# Altium PCB PCB1.PcbDoc
Units mm, origin at the board's own origin, x right, y up, seen from the top; angles counter-clockwise.
Board outline 50.8 x 22.35 mm, 2 copper layers (Top Layer, Bottom Layer); 41 components, 30 nets, 162 pads, 0 vias.
Unrouted connection lines stored in the file: 51.
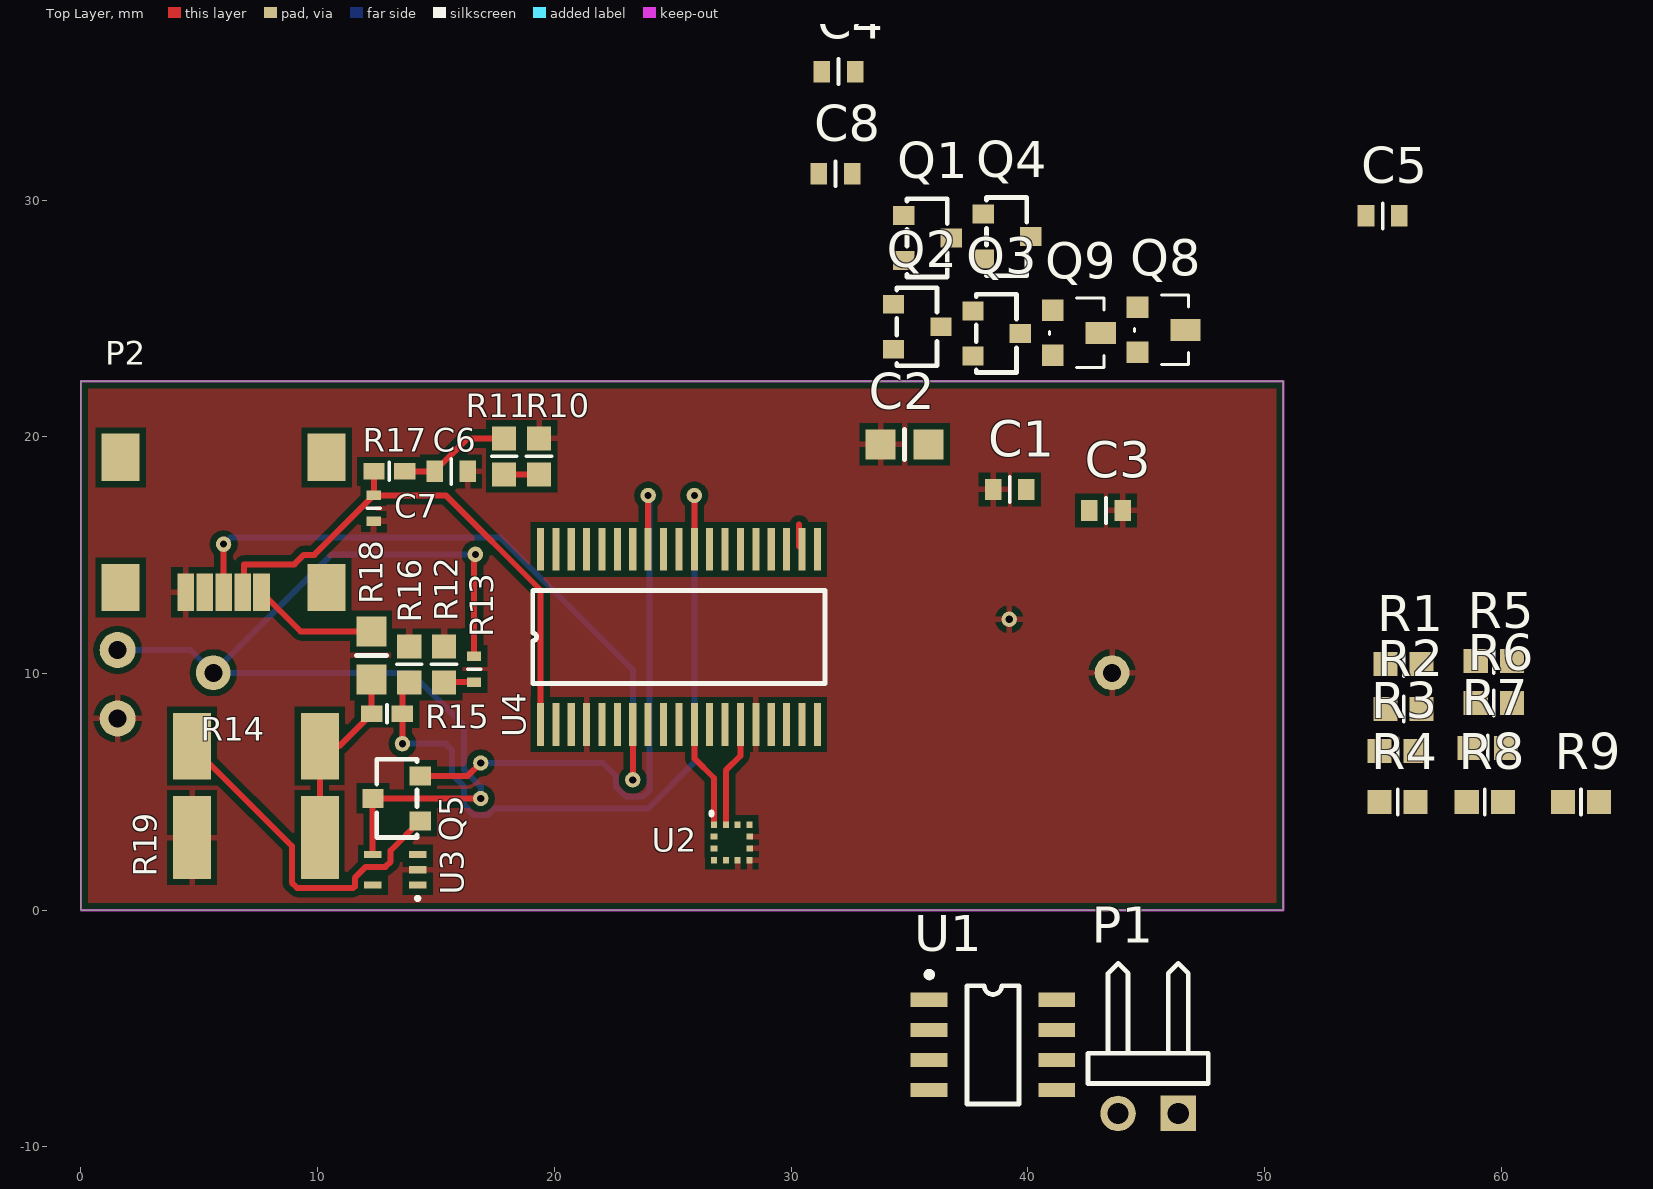
[diagram p0: Top Layer view]
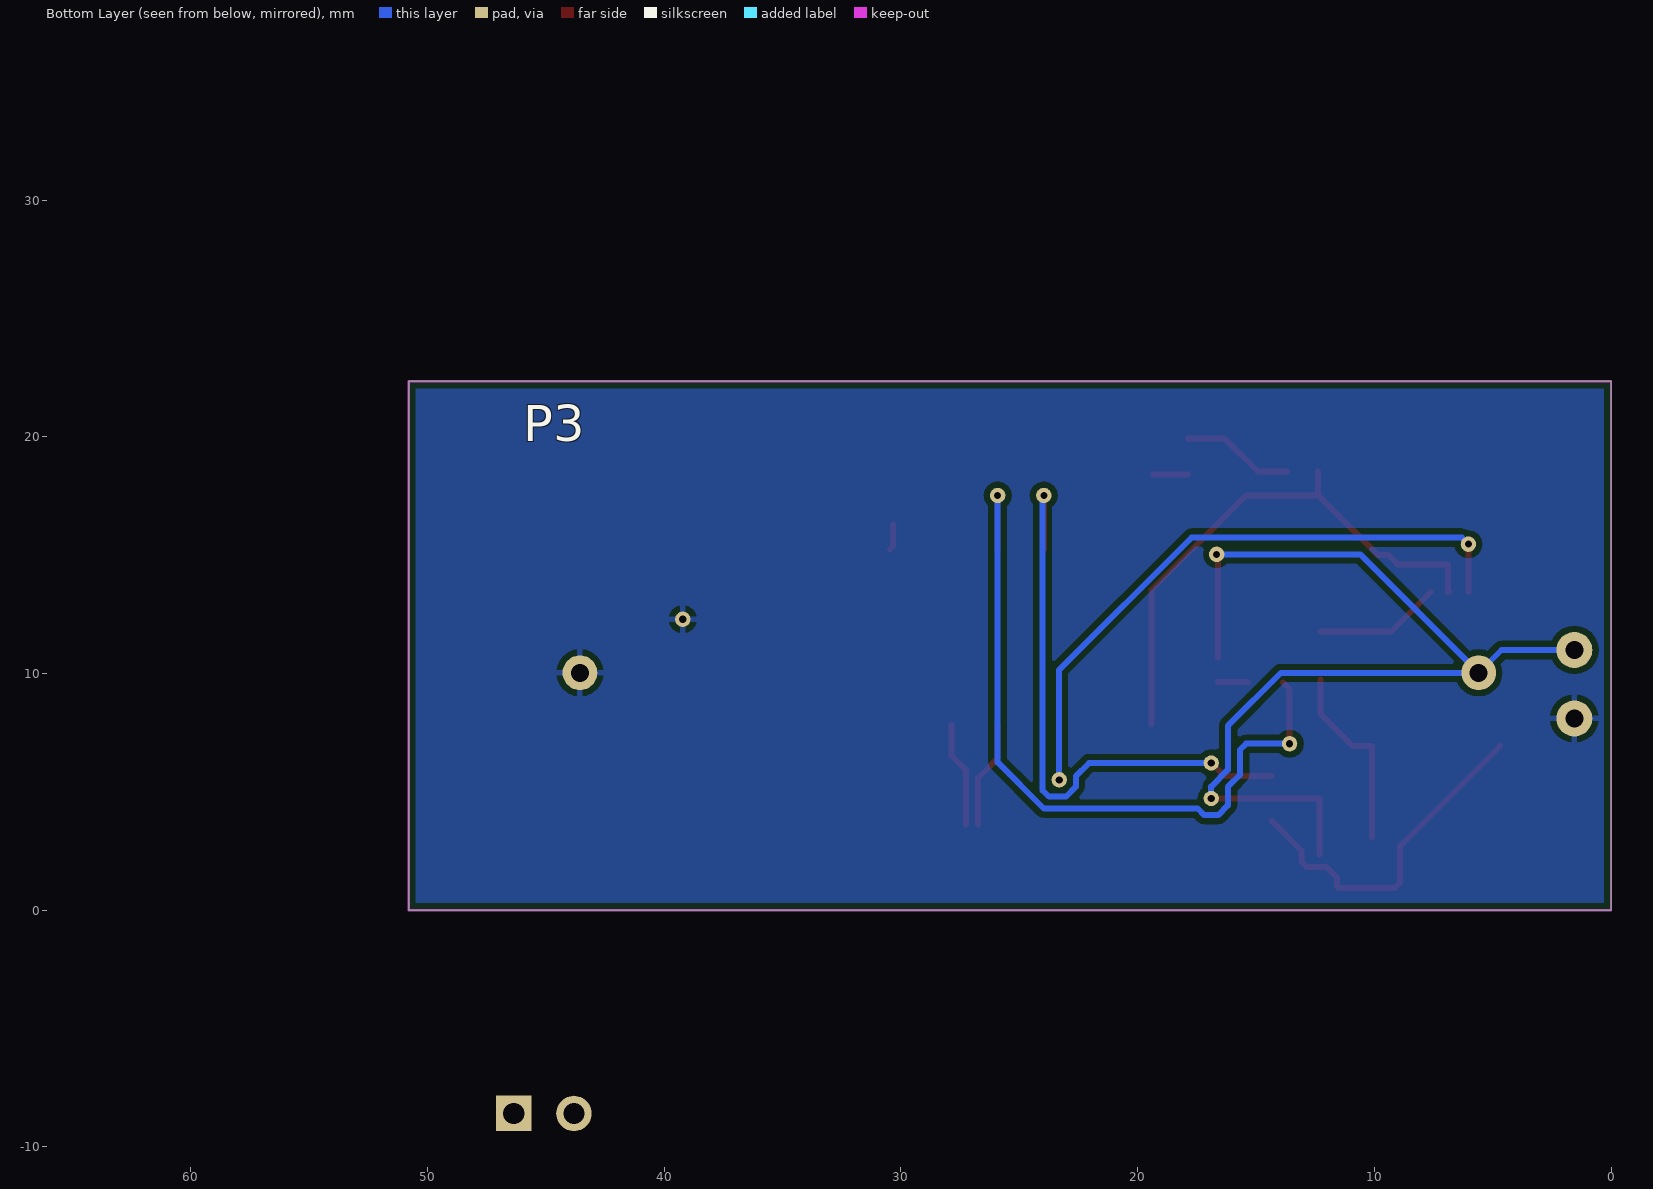
[diagram p1: Bottom Layer view, seen from below]

## Layer stack, top to bottom
Top Solder: solder mask 0.0102, Solder Resist, Dk 3.5
Top Layer: signal copper 0.0356
Dielectric 1: dielectric 0.32, FR-4, Dk 4.8
Bottom Layer: signal copper 0.0356
Bottom Solder: solder mask 0.0102, Solder Resist, Dk 3.5

## Board outline
0,0 50.8,0 50.8,22.352 0,22.352

## Design rules (kind name [scope] priority, off if disabled: settings)
Clearance [All] p1: gap=0.254
PolygonConnect [All] p1: connectstyle=Relief reliefconductorwidth=0.254 reliefentries=4 polygonreliefangle="90 Angle" airgapwidth=0.254
RoutingVias [All] p1: holewidth=0.711 width=1.27 viastyle="Through Hole" minholewidth=0.711 minwidth=1.27 maxholewidth=0.711 maxwidth=1.27
SolderMaskExpansion [All] p1: expansion=0.102
Width [All] p1: maxlimit=0.254 minlimit=0.254 preferedwidth=0.254
30 further rules are at their usual default settings.

## Components (designator, comment, footprint, x,y, rotation, side; value= is the part's Value field where it differs from the comment)
C1 "0.1uF" "0603 Small" 39.243,17.78 r0 top
C2 "10uF" "0805 Small" 34.798,19.685 r0 top
C3 "0.1uF" "0603 Small" 43.307,16.891 r0 top
C4 "0.1uF" "0603 Small" 32.004,35.433 r0 top
C5 "0.1uF" "0603 Small" 54.991,29.337 r0 top
C6 "0.1uF" "0603 Small" 15.638,18.542 r0 top
C7 "1nF" "0402 Small" 12.37,16.979 r90 top
C8 "0.1uF" "0603 Small" 31.877,31.115 r0 top
P1 "Header 2H" HDR1X2H 46.355,-8.585 r180 top
P2 "Mini USB" "Mini USB" 10.376,19.137 r270 top
P3 "Header 2" BH123A 43.561,10.033 r180 bottom
Q1 "MOSFET-P" SOT23 35.763,28.409 r270 top
Q2 "MOSFET-N" SOT23 35.331,24.653 r270 top
Q3 "MOSFET-N" SOT23 38.689,24.374 r270 top
Q4 "MOSFET-P" SOT23 39.121,28.463 r270 top
Q5 "MOSFET-N" SOT23 13.335,4.73 r90 top
Q8 "MMST2222A" SOT-23N 45.651,24.526 r270 top
Q9 "MMST2222A" SOT-23N 42.07,24.399 r270 top
R1 "1K" "0603 resistor" 55.88,10.414 r0 top
R2 "1M" "0603 resistor" 55.88,8.509 r0 top
R3 "10M" "0603 resistor" 55.626,6.731 r0 top
R4 "10M" "0603 resistor" 55.626,4.572 r0 top
R5 "1M" "0603 resistor" 59.69,10.541 r0 top
R6 "1K" "0603 resistor" 59.69,8.763 r0 top
R7 "0.1" "0603 resistor" 59.436,6.858 r0 top
R8 "100KΩ" "0603 Resistor" 59.309,4.572 r0 top
R9 "1MΩ" "0603 Resistor" 63.373,4.572 r0 top
R10 "1MΩ" "0603 Resistor" 19.355,19.177 r270 top
R11 "1MΩ" "0603 Resistor" 17.882,19.177 r90 top
R12 "1MΩ" "0603 Resistor" 15.342,10.389 r270 top
R13 "2.7M" "0402 Small" 16.608,10.185 r270 top
R14 "2.7Ω" "2010 resistor" 7.391,6.934 r0 top
R15 "330K" "0402 Resistor" 12.929,8.306 r0 top
R16 "1MΩ" "0603 resistor" 13.869,10.389 r270 top
R17 "47K" "0402 Resistor" 13.03,18.542 r180 top
R18 "2.4" "0805 Small" 12.268,10.77 r90 top
R19 "13Ω" "2512 RESISTOR" 7.391,3.073 r0 top
U1 "TS27L2" SOIC-8 38.532,-5.69 r0 top
U2 "LIS2HH12" LIS2HH12 26.745,2.116 r90 top
U3 "TPS71533DCKR" SC70_5 14.224,1.062 r180 top
U4 "MSP430F2272IDA" MSP430F2272IDA 19.413,7.849 r90 top

## Footprints (in the part's own frame and the unit in brackets; to place one, negate y for a bottom-side part, rotate by r counter-clockwise, add the part's x,y. Pads: shape width x height; smd on the part's side, far side on the other; paste and mask are expansions set on the pad)
"0402 Resistor" [mm]
  rect 0.9x0.7 smd: 1(-0.65,0) 2(0.65,0)
  silkscreen extent 0,-0.38 0,0.38, body extent -0.52,-0.27 0.53,0.28, height 0.25
"0402 Small" [mm]
  rect 0.4x0.6 smd: 1(-0.55,0) 2(0.55,0)
  silkscreen extent 0,-0.27 0,0.28, body extent -0.52,-0.27 0.53,0.28, height 0.25
"0603 resistor" [mil]
  rect 40x40 smd: 1(-30,0) 2(30,0)
  silkscreen extent 0,-21 0,21, body extent -30,-15 31,15, height 20
"0603 Resistor" [mil]
  rect 40x40 smd: 1(-30,0) 2(30,0)
  silkscreen extent 0,-21 0,21, body extent -30,-15 31,15, height 20
"0603 Small" [mm]
  rect 0.7x0.9 smd: 1(-0.7,0) 2(0.7,0)
  silkscreen extent 0,-0.53 0,0.53, body extent -0.77,-0.38 0.77,0.38, height 0.51
"0805 Small" [mil]
  rect 50x50 smd: 1(-40,0) 2(40,0)
  silkscreen extent 0,-25 0,25, body extent -40,-25 40,25, height 25
"2010 resistor" [mm]
  rect 1.6x2.8 smd: 1(-2.7,0) 2(2.7,0)
"2512 RESISTOR" [mm]
  rect 1.6x3.5 smd: 1(-2.7,0) 2(2.7,0)
BH123A [mm] "CR123A Battery Holder"
  round 1.47 hole 0.762: 2(0,0) 2(37.97,0)
HDR1X2H [mm] "Connector; Header; 2 Position; Right Angle"
  rect 1.5x1.5 hole 0.9: 1(0,0)
  round 1.5 hole 0.9: 2(2.54,0)
  silkscreen extent -1.27,-6.35 3.81,-1.27
LIS2HH12 [mm]
  rect 0.275x0.25 smd: 1(1.5,0) 2(1.5,-0.5) 3(1.5,-1) 4(1.5,-1.5) 7(0,-1.5) 8(0,-1) 9(0,-0.5) 10(0,0)
  rect 0.25x0.275 smd: 5(1,-1.5) 6(0.5,-1.5) 11(0.5,0) 12(1,0)
  silkscreen extent 1.93,0.1 2.01,0.1
"Mini USB" [mm]
  rect 1.6x0.7 smd: 1(5.7,-2.75) 2(5.7,-3.55) 3(5.7,-4.35) 4(5.7,-5.15) 5(5.7,-5.95)
  rect 2x1.6 smd: 6(5.5,-8.7) 7(0,-8.7) 8(0,0) 9(5.5,0)
MSP430F2272IDA [mm]
  rect 1.8x0.3 smd: 1(0,0) 2(0,-0.65) 3(0,-1.3) 4(0,-1.95) 5(0,-2.6) 6(0,-3.25) 7(0,-3.9) 8(0,-4.55) 9(0,-5.2) 10(0,-5.85) 11(0,-6.5) 12(0,-7.15) 13(0,-7.8) 14(0,-8.45) 15(0,-9.1) 16(0,-9.75) 17(0,-10.4) 18(0,-11.05) 19(0,-11.7) 20(7.4,-11.7) 21(7.4,-11.05) 22(7.4,-10.4) 23(7.4,-9.75) 24(7.4,-9.1) 25(7.4,-8.45) 26(7.4,-7.8) 27(7.4,-7.15) 28(7.4,-6.5) 29(7.4,-5.85) 30(7.4,-5.2) 31(7.4,-4.55) 32(7.4,-3.9) 33(7.4,-3.25) 34(7.4,-2.6) 35(7.4,-1.95) 36(7.4,-1.3) 37(7.4,-0.65) 38(7.4,0)
  silkscreen extent 1.73,-12.03 5.67,0.33
SC70_5 [mm]
  rect 0.75x0.3 smd: 1(0,0) 2(0,-0.65) 3(0,-1.3) 4(1.9,-1.3) 5(1.9,0)
  silkscreen extent -0.08,0.48 0.08,0.63, body extent 0.3,-1.66 1.54,0.34, height 1.07
SOIC-8 [mm]
  rect 1.55x0.6 smd: 1(-2.7,1.905) 2(-2.7,0.635) 3(-2.7,-0.635) 4(-2.7,-1.905) 5(2.7,-1.905) 6(2.7,-0.635) 7(2.7,0.635) 8(2.7,1.905)
  silkscreen extent -2.81,-2.5 1.1,3.09, body extent -1.91,-2.54 1.91,2.54, height 1.52
SOT23 [mm]
  rect 0.8x0.9 smd: 1(-0.95,-1) 2(0.95,-1) 3(0,1)
  silkscreen extent -1.65,-0.86 1.65,0.84, body extent -1.45,-1.32 1.45,1.47, height 1.02
SOT-23N [mil]
  rect 36x36 smd: B(-37.5,-40) E(37.5,-40)
  rect 36x50 smd: C(0.5,40)
  silkscreen extent -57,-45 58,45, body extent -57,-52 57,58, height 40

## Part data
C1 C3 C4 C5 C6 C8: library part CAP, "CAP CER 0.1UF 50V 10% X7R 0603"
C2: library part Cap, "CAP CER 10UF 6.3V X5R 0805"
C7: library part Cap, "CAP CER 1000PF 6.3V X5R 0402"
P1: "Header, 2-Pin, Right Angle"
P2: "CONN MINI USB RCPT RA TYPE B SMD"
P3: "CR123A Battery Holder"
Q1 Q4: "MOSFET P-CH 20V 4.2A SOT23"
Q2 Q3 Q5: "MOSFET N-CH 20V 2.3A SOT23"
Q8 Q9: library part NPN1, "TRANSISTOR NPN GP 40V SOT23"
R1 R6: library part Resistor, "RES SMD 1K OHM 5% 1/10W 060"
R2 R5: library part Resistor, "RES SMD 1M OHM 5% 1/10W 0603"
R3 R4: library part Resistor, "RES SMD 10M OHM 5% 1/10W 0603"
R7: library part Resistor, "RES SMD 0.1 OHM 5% 2W 2512"
R8: library part Res1, "RES SMD 100K OHM 5% 1/10W 0603"
R9 R10 R11 R12 R16: library part Res1, "RES SMD 1M OHM 5% 1/10W 0603"
R13: library part Resistor, "RES SMD 2.7M OHM 5% 1/16W 0402"
R14: library part Resistor, "RES SMD 2.7 OHM 5% 3/4W 2010"
R15: library part Resistor, "RES SMD 330K OHM 5% 1/10W 0603"
R17: library part Resistor, "RES SMD 47K OHM 5% 1/16W 0402"
R18: library part Resistor, "RES SMD 2 OHM 5% 0.4W 0805"
R19: library part Resistor, "RES SMD 13 OHM 1% 2W 2512"
U1: "OP AMP - 2 CHANNEL"
U3: "IC REG LDO 3.3V 50MA SC70-5"
U4: library part CMP-0365-00081-2, "IC MCU 16BIT 32KB FLASH 38TSSOP"

## Free pads (board coordinates)
  round 1.524 hole 0.762: 2(1.549,10.998) 3(1.549,8.103)
  round 0.65 hole 0.3: 2(6.026,15.469) 2(13.579,7.036) 2(16.662,15.037) 2(16.891,4.724) 2(16.891,6.223) 2(23.313,5.512) 2(23.963,17.526) 2(25.913,17.526) 2(39.218,12.294)

## Nets (pads, with @x,y where several pads share a name; then routed paths per layer and width w, separated by ;. In a path a pad name is that pad's centre, name@x,y a point inside that pad or via, vN(x,y) a via of type N, cw(c..) or ccw(c..) an arc to the next point about the centre after c; other vN are vias at no path point)
GND: C1.1 C2.1 C3.2 C4.2 C5.2 C6.2 C7.1 C8.1 P2.5 P3.2@43.561,10.033 pad.2@39.218,12.294 pad.3 R7.1 R8.1 R10.1 R12.1 R16.1 R19.1 U1.4 U2.5 U2.6 U2.7 U2.8 U3.2 U4.4 U4.15
NetC4_1: C4.1 U4.16
NetC5_1: C5.1 U4.2
NetC7_2: C7.2 P2.2 R17.2 U4.1 | length 23.3
  Top Layer w0.254: P2.2 6.895,13.437 6.895,14.618 9.018,14.618 9.418,15.018 9.858,15.018 C7.2 ; R17.2 12.37,18.532 C7.2 ; U4.1 19.413,13.531 15.415,17.529 C7.2
NetP1_2: P1.2 R10.2 R11.1 U4.21 | length 2.6
  Top Layer w0.254: R11.1 R10.2 ; 30.344,16.306 30.344,15.368 U4.21
NetP2_1: P2.1 R18.2 | length 5.3
  Top Layer w0.254: P2.1 9.277,11.786 R18.2
NetP2_3: P2.3 pad.2@6.026,15.469 pad.2@23.313,5.512 U4.7 | length 28.7
  Top Layer w0.254: P2.3 pad.2@6.026,15.468 ; pad.2@23.313,5.512 U4.7
  Bottom Layer w0.254: pad.2@6.026,15.469 6.3,15.743 17.724,15.743 23.313,10.154 pad.2@23.313,5.512
NetQ1_2: Q1.2 Q2.2 Q9.C R2.2 R3.2
NetQ1_3: Q1.3 Q2.1
NetQ2_3: Q2.3 Q3.3 Q8.E Q9.E R3.1 R4.1 R7.2 U1.3 U4.22
NetQ3_1: Q3.1 Q4.3
NetQ3_2: Q3.2 Q4.2 Q8.C R4.2 R5.2
NetQ5_1: Q5.1 R14.1 | length 14.7
  Top Layer w0.254: R14.1 8.91,2.715 8.91,1.166 9.134,0.942 11.497,0.942 11.568,1.013 11.568,1.37 12.029,1.831 12.857,1.831 13.08,2.054 13.08,2.525 Q5.1
NetQ5_2: pad.2@16.891,6.223 pad.2@23.963,17.526 Q5.2 U4.31 | length 25.7
  Top Layer w0.254: Q5.2 16.348,5.68 pad.2@16.891,6.223 ; U4.31 pad.2@23.963,17.526
  Bottom Layer w0.254: pad.2@16.891,6.223 22.048,6.223 22.607,5.664 22.607,5.22 23.021,4.806 23.754,4.806 24.019,5.071 24.019,17.526 pad.2@23.963,17.526
NetQ8_B: Q8.B R6.1
NetQ9_B: Q9.B R1.1
NetR1_2: R1.2 U4.18
NetR6_2: R6.2 U4.19
NetR8_2: R8.2 R9.2 U1.2
NetR9_1: R9.1 U1.1
NetR12_2: R12.2 R13.2 U4.20 | length 1.3
  Top Layer w0.254: R12.2 15.351,9.635 R13.2
NetR14_2: R14.2 R15.1 R18.1 R19.2 | length 8.1
  Top Layer w0.254: R19.2 R14.2 10.907,6.934 R15.1 12.279,9.743 R18.1
NetR15_2: pad.2@13.579,7.036 pad.2@25.913,17.526 R15.2 R16.2 U4.28 | length 31.9
  Top Layer w0.254: pad.2@13.579,7.036 R15.2 ; R15.2 13.579,9.337 R16.2 ; U4.28 pad.2@25.913,17.526
  Bottom Layer w0.254: pad.2@13.579,7.036 15.418,7.036 15.677,6.777 15.677,5.72 16.185,5.212 16.185,4.432 16.599,4.018 17.183,4.018 17.463,4.298 23.965,4.298 25.913,6.246 pad.2@25.913,17.526
NetU2_1: U2.1 U4.11 | length 4.6
  Top Layer w0.254: U4.11 25.913,6.422 26.745,5.589 U2.1
NetU2_2: U2.2 U4.14 | length 4.5
  Top Layer w0.254: U2.2 27.245,5.909 27.863,6.527 U4.14
NetU2_3: U2.3 U4.26
NetU2_4: U2.4 U4.25
POWER_IN: Q1.1 Q4.1 R2.1 R5.1
VBAT: C6.1 P1.1 P3.2@5.591,10.033 pad.2@1.549,10.998 pad.2@16.662,15.037 pad.2@16.891,4.724 Q5.3 R11.2 R13.1 R17.1 U3.4 | length 48.6
  Top Layer w0.254: U3.4 12.324,4.719 12.329,4.724 pad.2@16.891,4.724 ; R17.1 C6.1 16.335,19.939 R11.2 ; R13.1@16.608,10.674 R13.1 16.608,14.982 pad.2@16.662,15.037
  Bottom Layer w0.254: pad.2@1.549,10.998 4.626,10.998 P3.2@5.591,10.033 ; pad.2@16.662,15.037 10.595,15.037 P3.2@5.591,10.033 ; pad.2@16.891,4.724 16.891,5.225 16.185,5.931 16.185,7.793 13.945,10.033 P3.2@5.591,10.033
VCC: C1.2 C2.2 C3.1 C8.2 U1.8 U2.9 U2.10 U3.5
pads on no net: P2.4 P2.6 P2.7 P2.8 P2.9 U1.5 U1.6 U1.7 U2.11 U2.12 U3.1 U3.3 U4.3 U4.5 U4.6 U4.8 U4.9 U4.10 U4.12 U4.13 U4.17 U4.23 U4.24 U4.27 U4.29 U4.30 U4.32 U4.33 U4.34 U4.35 U4.36 U4.37 U4.38

## Polygon pours and split planes (outlines as drawn)
GND on Top Layer "Top Layer-No Net" (solid, pour order 2): 0,22.352 0,0 50.8,0 50.8,22.352 19.558,22.352
GND on Bottom Layer "Top Layer-No Net" (solid, pour order 8): 0,22.352 0,0 50.8,0 50.8,22.352

## Keep-outs
Keep-Out Layer:
  the board outline again, w0.1